# Altium PCB 05-01891R2.1T.PcbDoc
Units mil, origin at the board's own origin, x right, y up, seen from the top; angles counter-clockwise.
Board outline 1628.96 x 2610.93 mil, 2 copper layers (Top Layer, Top, Bottom Layer, Bottom); 39 components, 24 nets, 109 pads, 37 vias.
Unrouted connection lines stored in the file: 3.
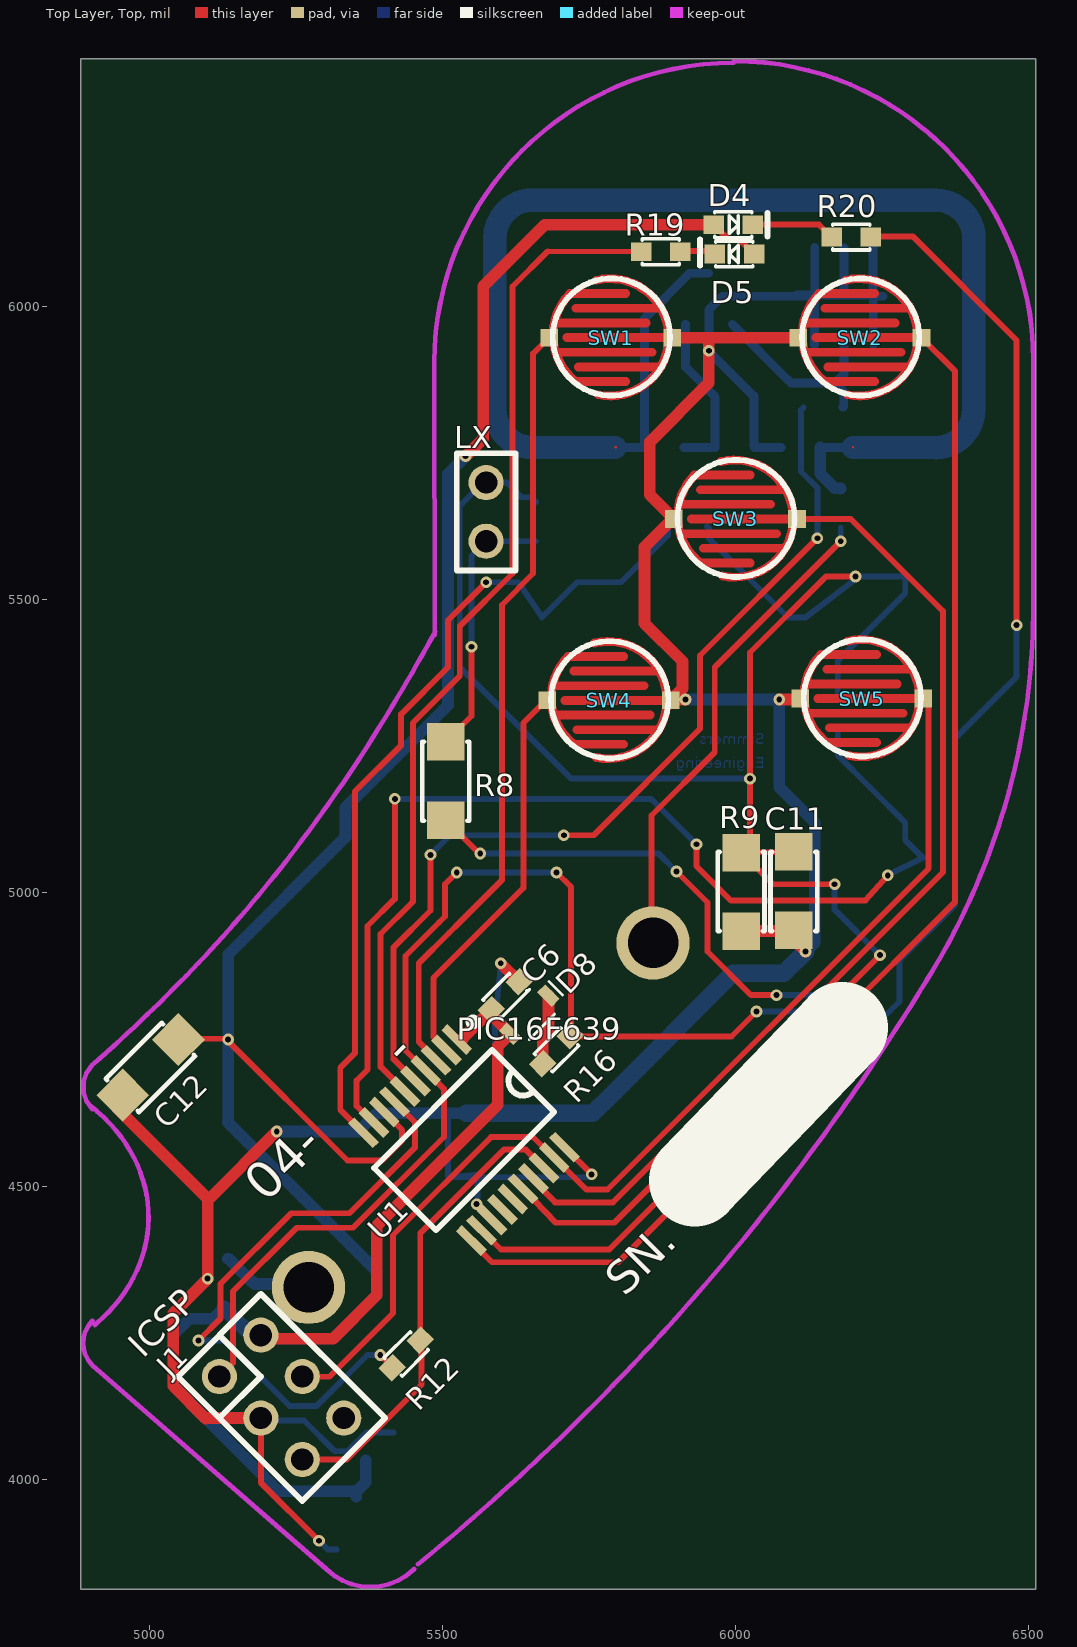
[diagram p0: Top Layer, Top view]
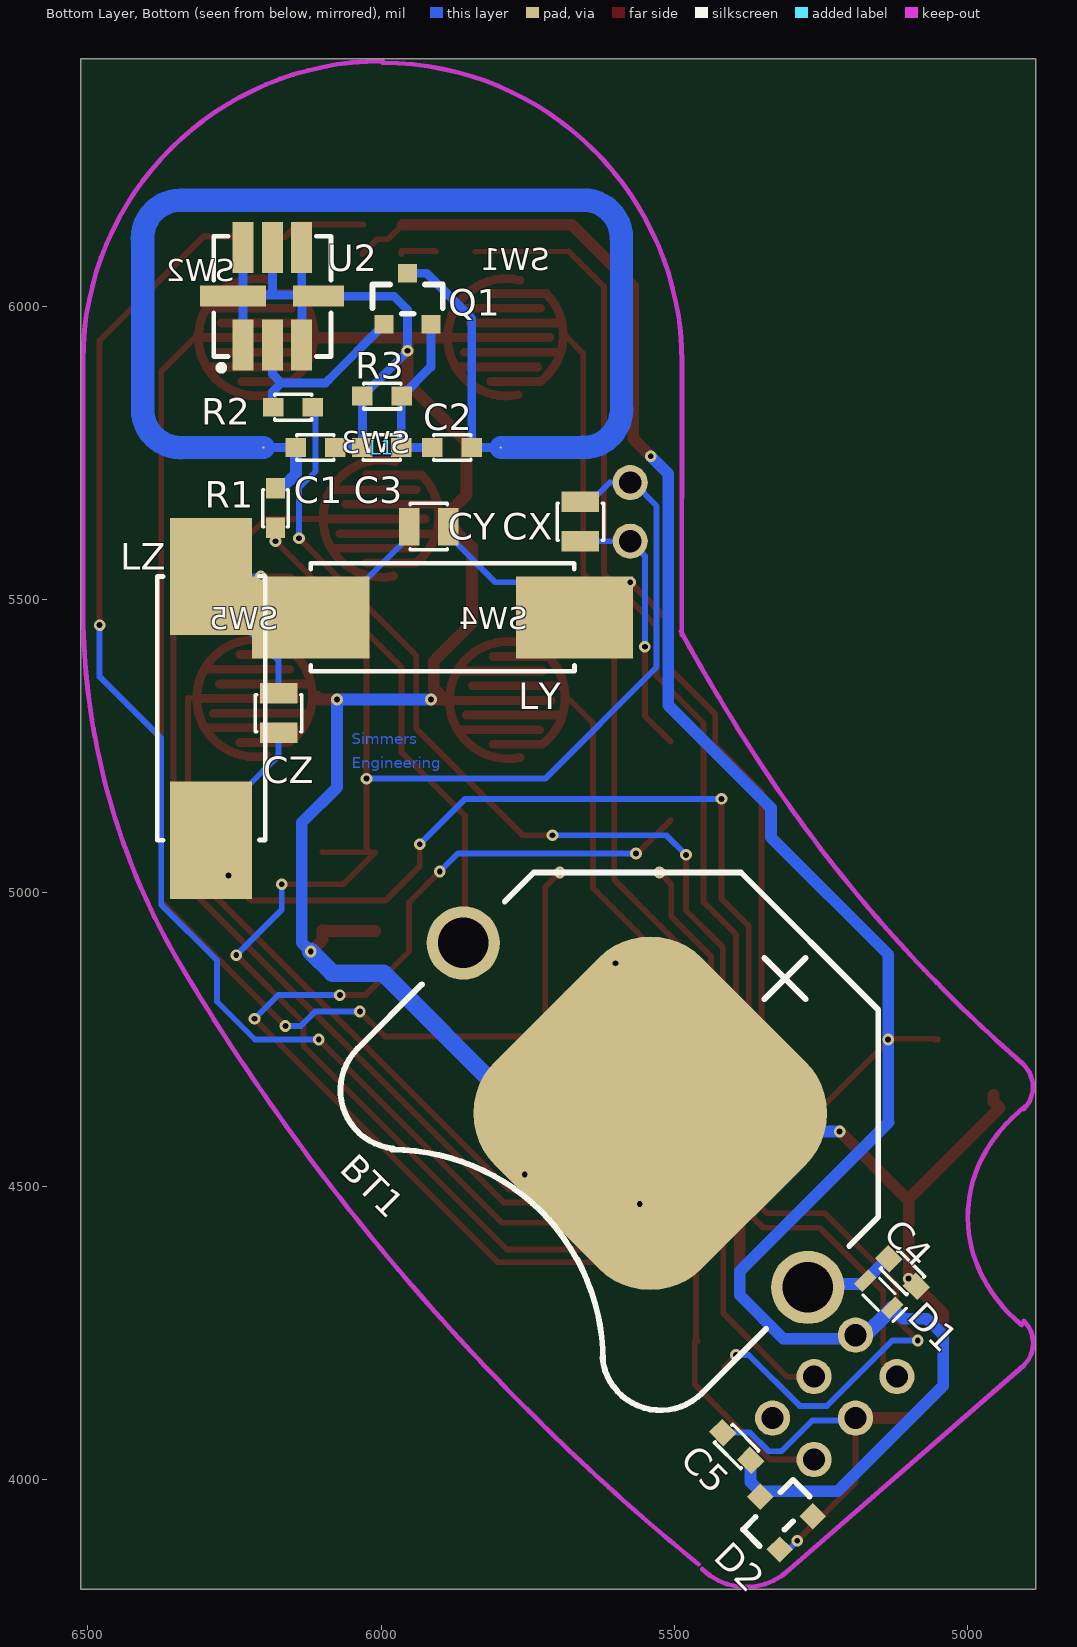
[diagram p1: Bottom Layer, Bottom view, seen from below]

## Layer stack, top to bottom
Top Layer, Top: signal copper 1.4
Dielectric: dielectric 12.6, FR-4, Dk 4.8
Bottom Layer, Bottom: signal copper 1.4

## Board outline
4883.42,3812.17 6512.38,3812.17 6512.38,6423.1 4883.42,6423.1

## Design rules (kind name [scope] priority, off if disabled: settings)
Clearance "Clearance_Top Layer, Top_PadToPad" [ExistsOnLayer('Top Layer, Top') And IsPad vs ExistsOnLayer('Top Layer, Top') And IsPad] p1: gap=5
Clearance "Clearance_Top Layer, Top_PadToLine" [ExistsOnLayer('Top Layer, Top') And IsPad vs ExistsOnLayer('Top Layer, Top') And IsWire] p2: gap=5
Clearance "Clearance_Top Layer, Top_LineToLine" [ExistsOnLayer('Top Layer, Top') And IsWire vs ExistsOnLayer('Top Layer, Top') And IsWire] p3: gap=5
Clearance "Clearance_Top Layer, Top_ViaToPad" [ExistsOnLayer('Top Layer, Top') And IsVia vs ExistsOnLayer('Top Layer, Top') And IsPad] p4: gap=5
Clearance "Clearance_Top Layer, Top_ViaToLine" [ExistsOnLayer('Top Layer, Top') And IsVia vs ExistsOnLayer('Top Layer, Top') And IsWire] p5: gap=5
Clearance "Clearance_Top Layer, Top_ViaToVia" [ExistsOnLayer('Top Layer, Top') And IsVia vs ExistsOnLayer('Top Layer, Top') And IsVia] p6: gap=5
Clearance "Clearance_Bottom Layer, Bottom_PadToPad" [ExistsOnLayer('Bottom Layer, Bottom') And IsPad vs ExistsOnLayer('Bottom Layer, Bottom') And IsPad] p7: gap=5
Clearance "Clearance_Bottom Layer, Bottom_PadToLine" [ExistsOnLayer('Bottom Layer, Bottom') And IsPad vs ExistsOnLayer('Bottom Layer, Bottom') And IsWire] p8: gap=5
Clearance "Clearance_Bottom Layer, Bottom_LineToLine" [ExistsOnLayer('Bottom Layer, Bottom') And IsWire vs ExistsOnLayer('Bottom Layer, Bottom') And IsWire] p9: gap=5
Clearance "Clearance_Bottom Layer, Bottom_ViaToPad" [ExistsOnLayer('Bottom Layer, Bottom') And IsVia vs ExistsOnLayer('Bottom Layer, Bottom') And IsPad] p10: gap=5
Clearance "Clearance_Bottom Layer, Bottom_ViaToLine" [ExistsOnLayer('Bottom Layer, Bottom') And IsVia vs ExistsOnLayer('Bottom Layer, Bottom') And IsWire] p11: gap=5
Clearance "Clearance_Bottom Layer, Bottom_ViaToVia" [ExistsOnLayer('Bottom Layer, Bottom') And IsVia vs ExistsOnLayer('Bottom Layer, Bottom') And IsVia] p12: gap=5
Clearance Clearance_Design_HoleToHole [(IsVia Or IsThruPin) vs (IsVia Or IsThruPin)] p13: gap=5
Clearance Clearance_Design_LineToLine [IsWire vs IsWire] p14: gap=5
Clearance Clearance_Design_PadToLine [IsPad vs IsWire] p15: gap=5
Clearance Clearance_Design_PadToPad [IsPad vs IsPad] p16: gap=5
Clearance Clearance_Design_ViaToLine [IsVia vs IsWire] p17: gap=5
Clearance Clearance_Design_ViaToPad [IsVia vs IsPad] p18: gap=5
Clearance Clearance_Design_ViaToVia [IsVia vs IsVia] p19: gap=5
Clearance [All] p20: gap=5
PlaneClearance [All] p1: clearance=12
PolygonConnect [All] p1: connectstyle=Relief reliefconductorwidth=10 reliefentries=4 polygonreliefangle="90 Angle" airgapwidth=10
RoutingVias [All] p1: holewidth=28 width=50 viastyle="Through Hole" minholewidth=28 minwidth=50 maxholewidth=28 maxwidth=50
SilkToSolderMaskClearance SilkscreenOverComponentPads [IsPad] p1: minsilkscreentomaskgap=10 clearancetoexposedcopper=TRUE
SolderMaskExpansion [All] p1: expansion=4
Width [All] p1: maxlimit=10 minlimit=10 preferedwidth=10
26 further rules are at their usual default settings.

## Components (designator, comment, footprint, x,y, rotation, side; value= is the part's Value field where it differs from the comment)
BT1 "" BAT20MMKEY3003 5555,4610 r135 bottom
C1 "470pF" CAP0603 6145.39,5759.88 r180 bottom
C2 "0.5pF" CAP0603 5845.39,5759.88 r0 bottom
C3 "18pF" CAP0603 5965.39,5759.88 r0 bottom
C4 "100nF" CAP0603 5134.1,4376.2 r225 bottom
C5 "1uF" CAP0603 5369.7,4032.1 r45 bottom
C6 "100nF" CAP0603 5583.8,4801.1 r45 top
C11 "1uF" CC1206 6100,5070 r270 top
C12 "1uF" CC1206 5050,4750 r225 top
CX "180pF" CAP-0603-DOUBLE 5660,5600 r90 bottom
CY "220pF" CAP-0603-DOUBLE 5885,5625 r0 bottom
CZ "220pF" CAP-0603-DOUBLE 6174.7,5340.3 r270 bottom
D1 "MA2S784" DIO-SS-MINI 5127.9,4292.5 r45 bottom
D2 "5.1V" SOT23_DIO-ZENER-BZX84-SOT23(Primary) 5320.1,3880.2 r135 bottom
D4 "{Value}" LED-0603 6030,6140 r270 top
D5 "{Value}" LED-0603 5965,6090 r90 top
D8 "1N4148WS" DIO-SOD-323 5681.25,4825 r225 top
J1 "" HDR-3X2-IDC 5120,4175 r45 top
L1 "433.92MHz" IND-PCB-40M-ROUNDED 5795.88,5759.83 r180 bottom
LX "9.0mH" 2PHDR 5575,5700 r0 top
LY "7.1mH" IND-PROTO 5670,5470 r0 bottom
LZ "7.1mH" IND-PROTO 6290,5090 r90 bottom
Q1 "NE94433" SOT23 5994.77,5969.96 r180 bottom
R1 "47" RES0603 6180,5690 r270 bottom
R2 "47K" RES0603 6116.65,5828.58 r0 bottom
R3 "220" RES0603 6031.77,5847.54 r180 bottom
R8 "Rlimit" RES-CRCW1206 5506,5258 r270 top
R9 "10M" RES-CRCW1206 6010,4935 r90 top
R12 "0" RES0603 5415,4190 r45 top
R16 "100K" RES0603 5718.75,4756.25 r225 top
R19 "600" RES0603 5906.25,6093.75 r180 top
R20 "600" RES0603 6231.25,6118.75 r180 top
SW1 "MOM-NO" SW-PCB-S 5787.74,5947.31 r0 bottom
SW2 "MOM-NO" SW-PCB-S 6212.74,5947.31 r0 bottom
SW3 "MOM-NO" SW-PCB-S 6000.25,5637.91 r0 bottom
SW4 "MOM-NO" SW-PCB-S 5784.61,5328.52 r0 bottom
SW5 "MOM-NO" SW-PCB-S 6215.89,5331.64 r0 bottom
U1 "PIC16F639" SSOP20-MODIFIED 5525,4750 r315 top
U2 "433.92MHz" SAW-ECS-SDR1-SMT 6235.41,5944.96 r180 bottom

## Footprints (in the part's own frame and the unit in brackets; to place one, negate y for a bottom-side part, rotate by r counter-clockwise, add the part's x,y. Pads: shape width x height; smd on the part's side, far side on the other; paste and mask are expansions set on the pad)
2PHDR [mil]
  round 60 hole 38: 1(0,0) 2(0,-100)
  silkscreen extent -50,-150 50,50
BAT20MMKEY3003 [mil]
  rrect50% 500x500 smd: 1(20,0)
  round 125 hole 86: 2(0,431) 3(0,-400)
  silkscreen extent -355,-400 420,431
CAP0603 [mil]
  rect 35x32 smd: 1(0,0) 2(67,0)
  silkscreen extent 2,-22 65,22
CAP-0603-DOUBLE [mil]
  rect 35x64 smd: 1(0,0) 2(67,0)
  silkscreen extent 2,-40 65,40
CC1206 [mil]
  rect 64x64 smd: 1(0,0) 2(134,0)
  silkscreen extent 0,-40 135,40
DIO-SOD-323 [mil]
  rect 20x35 smd: 1(92.5,0) 2(0,0)
  silkscreen extent -18,-30 76,30
DIO-SS-MINI [mil]
  rect 20x35 smd: 1(65,0) 2(0,0)
  silkscreen extent -18,-20 51,20
HDR-3X2-IDC [mil]
  round 60 hole 38: 1(0,0) 2(100,0) 3(0,-100) 4(100,-100) 5(0,-200) 6(100,-200)
  silkscreen extent -50,-250 150,50
IND-PCB-40M-ROUNDED [mm]
  round 0.1 smd: 1(0,0) 2(-10.287,0)
  Top Layer, Top lines w1.016: 5.235,1.653 cw(c3.584,1.653) 3.584,0.002 ; 5.232,1.676 5.232,9.093 ; 5.23,9.071 ccw(c3.579,9.071) 3.579,10.722 ; 3.556,0 0.025,0 ; 3.556,10.719 -13.868,10.719 ; -10.287,0 -13.843,0 ; -13.866,-0.003 cw(c-13.866,1.648) -15.517,1.648 ; -13.871,10.716 ccw(c-13.871,9.065) -15.522,9.065 ; -15.519,1.651 -15.519,9.068
IND-PROTO [mil]
  rect 200x140 smd: 1(0,0) 2(450,0)
  silkscreen extent 0,-92 450,92
LED-0603 [mil]
  rect 32x35 smd: 1(0,0) 2(0,-67)
  silkscreen extent -22,-65 22,-2
RES0603 [mil]
  rect 35x32 smd: 1(0,0) 2(67,0)
  silkscreen extent 2,-22 65,22
RES-CRCW1206 [mil]
  rect 64x64 smd: 1(0,0) 2(134,0)
  silkscreen extent 0,-40 135,40
SAW-ECS-SDR1-SMT [mil]
  rect 36x87 smd: 1(0,-10) 2(50,-10) 3(100,-10) 5(100,156) 6(50,155.67) 7(0,155.67)
  rect 87x36 smd: 4(129,73)
  rect 113x36 smd: 8(-17,73)
  silkscreen extent -50,-54 150,175
SOT23 [mil]
  rect 32x32 smd: 1(0,0) 2(80,0) 3(40,87)
  silkscreen extent -20,18 100,68
SOT23_DIO-ZENER-BZX84-SOT23(Primary) [mil]
  rect 32x32 smd: 1(40,87) 2(0,0) 2(80,0)
  silkscreen extent -20,18 100,68
SSOP20-MODIFIED [mil]
  rect 60x15 smd: 1(0,0) 2(0,-25) 3(0,-50) 4(0,-75) 5(0,-100) 6(0,-125) 7(0,-150) 8(0,-175) 9(0,-200) 10(0,-225) 11(260,-225) 12(260,-200) 13(260,-175) 14(260,-150) 15(260,-125) 16(260,-100) 17(260,-75) 18(260,-50) 19(260,-25) 20(260,0)
  silkscreen extent 55,-255 205,30
SW-PCB-S [mil]
  rect 30x30 smd far side: 1(-105,0) 2(105,0)
  Bottom Layer, Bottom lines w15: -95,-25 60,-25 ; -90,25 70,25 ; -75,0 95,0 ; -70,-75 25,-75 ; -69.75,-74.79 cw(c1.33,-4.45) -59.82,74.67 ; -60,-50 85,-50 ; -55,75 25,75 ; -55,50 85,50 ; -24.51,-97.83 ccw(c-1.33,-0.55) -21.44,97.41

## Part data
D1 D8: "Leadless Schottky Rectifier, 1 Ampere"

## Via types
v1: diameter 20, hole 10, Top Layer, Top to Bottom Layer, Bottom, 37 vias

## Nets (pads, with @x,y where several pads share a name; then routed paths per layer and width w, separated by ;. In a path a pad name is that pad's centre, name@x,y a point inside that pad or via, vN(x,y) a via of type N, cw(c..) or ccw(c..) an arc to the next point about the centre after c; other vN are vias at no path point)
DATA_OUT: R2.1 U1.5 | length 1621
  Top Layer, Top w10: U1.5 5417.25,4716.33 5417.25,4907.25 5480,4970 5480,4985.97 v1(5480,5065) ; v1(5707.6,5098.5) 5758.5,5098.5 5940,5280 5940,5405 v1(6140,5605)
  Bottom Layer, Bottom w10: v1(5480,5065) 5513.5,5098.5 v1(5707.6,5098.5) ; R2.1 6112,5823.93 6112,5719 6140,5691 v1(6140,5605)
GND: C1.2 C3.2 C4.2 C5.2 C6.2 C11.2 C12.2 D2.2@5263.53,3936.77 J1.3 R3.1 R9.1 U1.13 U1.20 U2.1 U2.3 U2.4 U2.5 U2.6 U2.7 U2.8 | length 6549.2
  Top Layer, Top w10: J1.3 5190.71,3994.11 v1(5290,3895) ; v1(5558.8,4469.2) 5558.8,4468.71 U1.13 ; U1.20 v1(5755,4520) ; C11.2@6100,4935 C11.2 ; U1.13 5588,4439.5 U1.13
  Top Layer, Top w20: C12.2 4955.25,4643.75 4945,4633.5 5100,4478.5 ; 5095,4105 5095.84,4104.29 ; 5095.71,4104.29 5095.84,4104.29 ; J1.3 5095.84,4104.29 ; v1(5217.8,4593.2) 5103.1,4478.5 5100,4478.5 ; v1(5600,4880) 5600,4879.65 C6.2 ; 5892.74,5947.31 5915,5947.31 5955,5947.31 ; v1(5915,5330) 5891.1,5330 ; R9.1 C11.2@6100,4935 ; v1(6075,5330) 6105,5330 6110,5335 6110.89,5331.64 ; C11.2 C11.2@6100,4935 ; 6107.74,5947.31 5955,5947.31 ; v1(6119.9,4900.1) 6101.3,4918.7 6100,4920 C11.2@6100,4935 ; 5095.84,4104.29 5096.9,4103.4 5041.1,4159.2 5041.1,4283.2 v1(5100,4342.1) 5100,4478.5 ; 5891.1,5330 5890,5330 5889.61,5328.52 5891.1,5330 ; 5891.1,5330 5910,5348.9 5910,5395 5845,5460 5845,5590 5894.08,5639.08 ; 5894.08,5639.08 5895.25,5637.91 5895,5640 5894.08,5639.08 ; 5894.08,5639.08 5854.1,5679.06 5854.1,5769.1 5955,5870 v1(5955,5925) 5955,5947.31
  Bottom Layer, Bottom w10: J1.3 5195,4100 5195.3,4100.3 5264.3,4100.3 5317,4047.6 5338.7,4047.6 5370.58,4079.48 C5.2 ; v1(5290,3895) 5304.8,3880.2 5320.1,3880.2 ; v1(5558.8,4469.2) 5560,4470.4 5560,4515 ; v1(5600,4880) 5589.8,4773 5590,4772.8 5590,4630 5540.86,4624.14 5510,4625 5510,4624.14 5510,4517.51 5512.51,4515 ; v1(5755,4520) 5750,4515 5560,4515 ; 5512.51,4515 5560,4520 5560,4515 ; 5512.51,4515 5560,4515
  Bottom Layer, Bottom w15: C1.2 6075.12,5759.88 6075,5760 6074.88,5759.88 C3.2 6035,5760 6031.77,5763.23 R3.1 5955,5924.31 v1(5955,5925) 5955,5995 5977.96,6017.96 U2.4 U2.4@6121.31,6017.96 ; U2.3 U2.3@6135,5935 ; U2.5 U2.4@6135.41,6020 ; U2.6 6185.41,6020 ; U2.1 6235.41,6014.59 U2.8@6235,6015 ; U2.4@6121.31,6017.96 U2.4@6133.57,6016.43 ; U2.4@6121.31,6017.96 6132.04,6017.96 U2.4@6133.57,6016.43 ; U2.4@6121.31,6017.96 6105,6020 U2.4@6135.41,6020 ; U2.4@6133.57,6016.43 6135,6015 U2.3@6135,5935 ; U2.4@6133.57,6016.43 U2.4@6135.41,6016.2 ; U2.3@6135,5935 6135.41,5935.41 U2.4@6135.41,6016.2 ; U2.4@6135.41,6016.2 U2.4@6135.41,6020 ; U2.4@6135.41,6020 6185.41,6020 ; 6185.41,6020 6235,6020 U2.8@6235,6015 ; U2.8@6235,6015 U2.8@6235.41,6015.41 ; U2.8@6235.41,6015.41 U2.8@6235.41,6024.59 ; U2.8@6235.41,6015.41 U2.8@6237.96,6017.96 ; U2.8@6235.41,6015.41 U2.8@6237.96,6017.96 ; U2.8@6235.41,6024.59 U2.7 6235,6100 6235,6025 U2.8@6235.41,6024.59 ; U2.8@6235.41,6024.59 U2.8@6242.04,6017.96 ; U2.8@6237.96,6017.96 U2.8@6242.04,6017.96 ; U2.8@6237.96,6017.96 U2.8@6242.04,6017.96 ; U2.8@6237.96,6017.96 U2.8@6242.04,6017.96 ; U2.8@6242.04,6017.96 U2.8 ; U2.8@6242.04,6017.96 U2.8 ; U2.8@6242.04,6017.96 U2.8
  Bottom Layer, Bottom w20: C4.2 v1(5100,4342.1) ; v1(5217.8,4593.2) 5357.3,4593.2 5388.24,4624.14 5510,4624.14 5540.86,4624.14 ; v1(5915,5330) 5955,5330 v1(6075,5330) 6075,5180.6 6135.4,5120.2 6135.4,4915.4 6120.1,4900.1 v1(6119.9,4900.1)
  Bottom Layer, Bottom w30: 5540.86,4624.14 5757.14,4624.14 5788.2,4655.2 5995.9,4862.9 6082.7,4862.9 ; 6082.9,4862.9 6082.7,4862.9 ; v1(6119.9,4900.1) 6082.7,4862.9
LCCOM-PIN: C11.1 CX.2 CY.2 CZ.1 LX.1 LY.2 LZ.2 R9.2 U1.12 | length 3640.6
  Top Layer, Top w10: U1.12 5600.46,4391.7 5785.1,4391.7 6132.3,4738.9 6132.3,4779.2 v1(6247,4893.9) ; C11.1 R9.2@6018.5,5069.09 ; v1(6169.5,5014.8) 6064.2,5014.8 R9.2 ; v1(6205,5540) 6155,5540 6025,5410 v1(6025,5195) 6025,5075 R9.2@6018.5,5069.09 ; R9.2 6018.4,5069 R9.2@6018.5,5069.09 ; R9.2 R9.2@6018.5,5069.09
  Bottom Layer, Bottom w10: CX.2 5652,5675 5635,5675 5610,5700 LX.1 ; CY.2 5955,5622 5955,5605 6090,5470 LY.2 6205,5535 v1(6205,5540) LZ.2 6290,5511.4 6224.3,5445.7 6174.7,5396.1 CZ.1 ; v1(6025,5195) 6020,5195 5850.99,5195 ; v1(6169.5,5014.8) 6169.5,4971.4 v1(6247,4893.9) ; LX.1@5570,5701.11 5570,5700 LX.1 ; LX.1@5570,5701.11 LX.1 ; LX.1@5570,5701.11 5530,5660 5530,5385 5720,5195 5849.09,5195.38 ; 5849.09,5195.38 ccw(c5850.99,5200) 5850.99,5195 ; 5849.09,5195.38 5850.99,5195
LF_DATA: R12.1 U1.7 | length 1055
  Top Layer, Top w10: v1(5084.5,4236.7) 5121.7,4273.9 5121.7,4332.8 5242.6,4453.7 5341.8,4453.7 5453.4,4565.3 5453.4,4609.47 U1.7 ; v1(5394.5,4211.9) 5415,4191.4 R12.1
  Bottom Layer, Bottom w10: v1(5084.5,4236.7) 5127.9,4236.7 5239.5,4125.1 5286,4125.1 5372.8,4211.9 v1(5394.5,4211.9)
LX-PIN: R8.2 U1.11 | length 1754.1
  Top Layer, Top w10: R8.2 5506.1,5124.1 5562.7,5067.5 v1(5565,5067.5) ; U1.11 5549.75,4405.25 5550,4405 5585,4370 5800.6,4370 v1(6216,4785.4) ; v1(5899.8,5036.5) 5952.5,4983.8 5952.5,4900.1 6026.9,4825.7 v1(6070.3,4825.7)
  Bottom Layer, Bottom w10: v1(5565,5067.5) 5868.8,5067.5 v1(5899.8,5036.5) ; v1(6070.3,4825.7) 6175.7,4825.7 v1(6216,4785.4)
LY-PIN: CY.1 LY.1 U1.10 | length 1473.7
  Top Layer, Top w10: U1.10 5365.8,4590.9 5326.3,4630.4 5326.3,4701.7 5351.1,4726.5 5351.1,5172.9 5430,5251.8 5430,5305 5510,5385 5510,5465 v1(5575,5530)
  Bottom Layer, Bottom w10: v1(5575,5530) 5630,5530 LY.1 5730,5530 5805,5530 5885,5610 CY.1
LZ-PIN: CZ.2 LZ.1 U1.9 | length 1886.2
  Top Layer, Top w10: U1.9 5382.22,4608.58 5375.9,4614.9 5354.2,4636.6 5354.2,4680 5372.8,4698.6 5372.8,4943.5 5419.3,4990 v1(5419.3,5160.5) ; v1(5933.9,5083) 5933.9,5045.8 5992.8,4986.9 6221.9,4986.9 v1(6260,5030)
  Bottom Layer, Bottom w10: v1(5419.3,5160.5) 5856.4,5160.5 v1(5933.9,5083) ; CZ.2 6174.7,5234.9 6230.5,5179.1 6290,5119.6 LZ.1 6320,5060 v1(6260,5030)
MCLR: J1.1 R16.1 U1.4 | length 3403
  Top Layer, Top w10: J1.1 5143.4,4198.4 5143.4,4320.4 5251.9,4428.9 5348,4428.9 5503,4583.9 5503,4665.93 ; U1.4 5471.97,4696.91 U1.4@5481.27,4687.6 ; v1(5525,5035) 5505,5015 5505,4977.84 5505,4960 5494.67,4949.67 5437.5,4892.5 5437.5,4793.75 5437.5,4731.25 U1.4@5481.27,4687.6 ; v1(5695,5035) 5720,5010 R16.1@5720,4756.13 ; v1(6036.2,4797.8) 5993.4,4755 5721.13,4755 R16.1@5720,4756.13 ; v1(6163.3,4773) 6375,4985 6375,5875 6375,5890 6317.74,5947.26 ; U1.4@5481.27,4687.6 5500,4668.75 5503,4665.93 ; U1.4@5481.27,4687.6 5503,4665.93 ; R16.1@5720,4756.13 R16.1 5720,4755 R16.1@5720,4756.13
  Bottom Layer, Bottom w10: v1(5525,5035) v1(5695,5035) ; v1(6036.2,4797.8) 6112.2,4797.8 6137,4773 v1(6163.3,4773)
NET00000: D8.2 R16.2 | length 120.2
  Top Layer, Top w20: R16.2 5671.37,4756.37 5681.25,4766.25 D8.2
NET00001: C1.1 C2.1 L1.1 L1.2 Q1.3 R1.1 | length 557.8
  Bottom Layer, Bottom w15: L1.1 C2.1 5845.39,5980.39 5921.96,6056.96 Q1.3 ; C1.1 6145,5760 6145.17,5759.83 L1.2
  Bottom Layer, Bottom w20: C1.1@6145,5760 6145,5715 6169.8,5690.2 R1.1
NET00002: C2.2 C3.1 Q1.2 R3.2 | length 284.1
  Bottom Layer, Bottom w15: C2.2 C3.1 5965.39,5844.61 5965,5845 R3.2 5915,5897.31 5915,5970 Q1.2
NET00003: D5.1 R19.1 | length 64.3
  Top Layer, Top w10: R19.1 5907.5,6095 5965,6095 D5.1
NET00005: Q1.1 R2.2 U2.2 | length 336.2
  Bottom Layer, Bottom w15: Q1.1 6089.73,5875 6090,5875 6095,5870 6170,5870 ; R2.2 6185,5829.93 6185,5855 6170,5870 ; U2.2 6185.41,5885.41 6170,5870
NET00006: D4.1 R20.2 | length 143.1
  Top Layer, Top w10: D4.1 6143,6140 R20.2
NET00016: CX.1 LX.2 R8.1 | length 455.6
  Top Layer, Top w10: R8.1 5550,5302 v1(5550,5420)
  Bottom Layer, Bottom w10: v1(5550,5420) 5550,5575 LX.2 CX.1
RA0/DATA: J1.4 U1.19 | length 1908.2
  Top Layer, Top w10: J1.4 5255.3,4175 5255,4174.7 5307.7,4174.7 5416.2,4283.2 5416.2,4416.5 5583.6,4583.9 5654.9,4583.9 U1.19@5690.33,4548.47 ; 6320.89,5331.64 6329.5,5333.03 6329.5,5041.5 5782,4494 5746,4494 U1.19@5691.17,4548.83 ; U1.19@5690,4550 U1.19@5690.33,4548.47 ; U1.19@5690,4550 U1.19@5690.33,4548.47 ; U1.19@5690,4550 U1.19@5690.33,4548.47 ; U1.19@5690,4550 U1.19@5691.17,4548.83 ; U1.19@5690,4550 U1.19@5691.17,4548.83 ; U1.19@5690,4550 U1.19@5691.17,4548.83 ; U1.19@5690,4550 U1.19@5691.17,4548.83 ; U1.19@5690.33,4548.47 U1.19@5691.17,4548.83 ; U1.19@5690.33,4548.47 U1.19 ; U1.19@5690.33,4548.47 U1.19 ; U1.19@5690.33,4548.47 U1.19 ; U1.19@5690.33,4548.47 U1.19@5691.17,4548.83 ; U1.19 U1.19@5691.17,4548.83
RA1/CLK: J1.5 R12.2 U1.18 | length 808.7
  Top Layer, Top w8: R12.2 R12.2@5465,4234.75
  Top Layer, Top w10: J1.5 5337.08,4033.58 5465,4161.5 R12.2@5465,4234.75 ; R12.2 5460,4235 R12.2 ; R12.2 5462.7,4237.7 5462.7,4419.6 5605.3,4562.2 5642.5,4562.2 U1.18@5673.9,4530.8 ; U1.18@5673.9,4530.8 U1.18 5673.95,4530.34 U1.18@5674.36,4530.34 ; U1.18@5673.9,4530.8 U1.18@5674.36,4530.34 ; U1.18@5673.9,4530.8 U1.18@5674.36,4530.34
RA2: U1.17 | length 1711.1
  Top Layer, Top w10: U1.17 5655.81,4510.81 5655,4510 5692.7,4472.3 5791.3,4472.3 6354.26,5035.26 6354.26,5480.74 6197.09,5637.91 6105.25,5637.91
RC0: R20.1 U1.16 | length 2356.1
  Top Layer, Top w10: U1.16 5693.75,4437.5 5793.75,4437.5 v1(6106.25,4750) ; R20.1 6233.75,6118.75 6235,6120 6302.5,6120 6480,5942.5 v1(6480,5456.8)
  Bottom Layer, Bottom w10: v1(6106.25,4750) 6215,4750 6280,4815 6280,4885 6375,4980 6375,5263.8 6480,5368.8 v1(6480,5456.8)
RC4: R19.2 U1.6 | length 2046.1
  Top Layer, Top w10: 5530,5430 5530,5455 ; R19.2 5837.5,6093.75 5680.31,6094.65 5620,6034.65 5620,5545 5530,5455 ; 5394.5,4704.8 5394.5,4928 ; 5394.5,4704.8 5395,4703.22 ; 5394.5,4704.8 5395,4704.3 ; 5394.5,4928 5395,4930 ; 5394.5,4928 5395,4928.5 ; 5395,4703.22 U1.6 5436.61,4662.69 5434.8,4664.5 5395,4704.3 ; 5395,4703.22 5395,4704.3 ; 5395,4703.22 5395,4704.3 ; 5395,4703.22 5395,4704.3 ; 5395,4703.22 5395,4704.3 ; 5395,4703.22 5395,4704.3 ; 5395,4703.22 5395,4704.3 ; 5395,4704.3 5395,4928.5 ; 5395,4928.5 5395,4930 ; 5395,4930 5448,4983 5450,4985 5450,5290 5530,5370 5530,5455
S1: U1.3 | length 1337.6
  Top Layer, Top w10: U1.3 5489.64,4715.06 5487.5,4717.2 5468.75,4737.5 5460,4746.25 5460,4880 5511.81,4931.81 5530,4950 5602.3,5022.3 5602.3,5412.3 5602,5412 5602,5491 5655,5545 5655,5920 5680,5945 5682.31,5947.31 5682.74,5947.31
SO: U1.2 | length 690.3
  Top Layer, Top w10: 5679.61,5328.52 5677.02,5328.52 5673.5,5325 5638.5,5290 5638.5,5008.5 5485,4855 5485,4754.78 U1.2@5507.45,4732.32 ; U1.2@5507.45,4732.32 U1.2 5508.18,4731.47 5508.31,4731.47 U1.2@5507.45,4732.32
VBAT: C4.1 D1.1 R1.2 | length 1010.3
  Top Layer, Top w10: 5859.76,4914.76 5859.76,4915.24 5857,4918 5857,5132 5965,5240 5965,5385 v1(6180,5600)
  Bottom Layer, Bottom w10: v1(6180,5600) R1.2
  Bottom Layer, Bottom w20: C4.1 5136.12,4376.2 5137.2,4375.12 D1.1 ; 5272.16,4327.16 5254.44,4327.16 5248.8,4332.8 D1.1@5180.6,4332.8 ; D1.1 D1.1@5180.6,4332.8 ; D1.1 5174.94,4338.46 D1.1@5180.6,4332.8
VDD: C5.1 C6.1 C12.1 D1.2 D2.1 D4.2 D5.2 D8.1 J1.2 U1.1 U1.8 | length 4971
  Top Layer, Top w10: C12.1 5055.3,4750 5056.6,4751.3 v1@5131,4751.3 ; v1(5135,4750) 5132.3,4750 v1@5131,4751.3 ; U1.8 5431.7,4595.81 5431.7,4577.7 5397.6,4543.6 5338.7,4543.6 v1@5131,4751.3 ; U1.1 U1.1@5535,4750 ; D4.2 5988,6115 6007,6115 D5.2
  Top Layer, Top w20: J1.2 5196.62,4239.8 5313.9,4239.8 5388.3,4314.2 5388.3,4345.2 5388.3,4432 5594.91,4638.61 5594.91,4730.53 5595,4730 5595,4738.75 D8.1 5580,4795.44 C6.1@5580,4797.3 ; U1.1@5535,4750 5535,4752.3 C6.1@5580,4797.3 ; v1(5540,5745) 5570,5775 5570,6035 5675,6140 D4.2 ; C6.1@5580,4797.3 5580,4800 C6.1 C6.1@5580,4797.3
  Bottom Layer, Bottom w20: D1.2@5130,4290 D1.2 5109.3,4273.9 5069,4273.9 5041.1,4246 5041.1,4159.2 5220.9,3979.4 D2.1@5354.2,3979.4 ; D2.1 5353.33,3978.53 D2.1@5354.2,3979.4 ; C5.1 5369.7,3994.9 D2.1@5354.2,3979.4 ; v1(5540,5745) 5510,5715 5510,5320 5335,5145 5335,5095 5135,4895 v1(5135,4750) 5135,4610 5134.1,4608.7 5388.3,4354.5 5388.3,4314.2 5313.9,4239.8 J1.2@5193,4239.8 ; J1.2@5193,4239.8 J1.2 5190.71,4242.09 J1.2@5193,4239.8
  Bottom Layer, Bottom w25: D1.2 5127.9,4292.1 5130,4290 5180,4240 J1.2
pads on no net: BT1.1 BT1.2 BT1.3 D2.2@5320.1,3880.2 J1.6 SW1.1 SW1.2 SW2.1 SW2.2 SW3.1 SW3.2 SW4.1 SW4.2 SW5.1 SW5.2 U1.14 U1.15
copper on no net: | length 1.7
  Top Layer, Top w3.94: 5795.88,5759.83 5795.88,5760.57 5796.14,5760.83 ; 6200.88,5759.83 6200.88,5760.38

## Keep-outs
Keep-Out Layer, Board:
  lines w8: 4898.86,4637.98 4911.07,4627.94 4922.49,4617.51 4933.12,4606.72 4942.96,4595.59 4952.01,4584.16 4960.27,4572.43 4967.73,4560.45 4974.4,4548.24 4980.28,4535.82 4985.36,4523.22 4989.64,4510.47 4993.14,4497.58 4995.83,4484.6 4997.72,4471.54 4998.82,4458.43 4999.12,4445.29 4998.62,4432.16 4997.31,4419.05 4995.21,4406 4992.31,4393.03 4988.6,4380.17 4984.09,4367.44 4978.77,4354.86 4972.65,4342.47 4965.73,4330.29 4957.99,4318.35 4949.46,4306.67 4940.11,4295.28 4929.96,4284.2 4918.99,4273.47 4907.22,4263.1 ; 4903.7,4270.14 4896.66,4261.78 4891.38,4252.1 4888.74,4242.42 4887.42,4231.86 4888.74,4221.74 4891.38,4212.06 4896.66,4202.38 4903.7,4194.02 5302.34,3846.86 5315.58,3835.81 5330.03,3827.22 5345.36,3821.08 5361.3,3817.4 5377.52,3816.17 5393.74,3817.4 5409.63,3821.08 5424.91,3827.22 5439.26,3835.81 5452.38,3846.86 ; 4903.7,4630.94 4893.35,4644.94 4888.18,4660.78 4888.18,4677.22 4893.35,4693.06 4903.7,4707.06 4915.78,4717.69 4927.75,4728.35 4939.61,4739.03 4951.36,4749.73 4963,4760.46 4974.54,4771.22 4985.97,4782 4997.29,4792.82 5008.51,4803.66 5019.64,4814.54 5030.66,4825.45 5041.58,4836.4 5052.41,4847.39 5063.15,4858.41 5073.79,4869.47 5084.34,4880.58 5094.8,4891.73 5105.17,4902.92 5115.45,4914.16 5125.65,4925.44 5135.76,4936.77 5145.79,4948.16 5155.74,4959.59 5165.61,4971.08 5175.4,4982.62 5185.12,4994.21 5194.76,5005.87 5204.32,5017.58 5213.82,5029.35 5223.24,5041.19 5232.59,5053.08 5241.88,5065.04 5251.1,5077.07 5260.25,5089.16 5269.35,5101.32 5278.38,5113.55 5287.35,5125.86 5296.26,5138.23 5305.11,5150.68 5313.91,5163.21 5322.65,5175.81 5331.34,5188.49 5339.98,5201.25 5348.57,5214.1 5357.12,5227.02 5365.61,5240.03 5374.06,5253.13 5382.47,5266.31 5390.83,5279.58 5399.16,5292.94 5407.44,5306.4 5415.69,5319.94 5423.9,5333.58 5432.08,5347.31 5440.22,5361.15 5448.33,5375.08 5456.41,5389.11 5464.46,5403.24 5472.49,5417.48 5480.48,5431.81 5488.46,5446.26 ; 5458.54,3854.78 5470.6,3864.66 5482.62,3874.58 5494.6,3884.56 5506.53,3894.57 5518.43,3904.64 5530.29,3914.75 5542.1,3924.91 5553.87,3935.12 5565.61,3945.37 5577.29,3955.67 ; 5487.14,5440.1 5486.7,5905.18 5487.58,5931.58 5489.34,5957.54 5492.42,5983.06 5497.26,6008.14 5502.98,6032.78 5509.58,6056.98 5517.5,6080.74 5526.74,6104.06 5537.3,6126.5 5548.3,6148.5 5560.62,6170.06 5573.82,6190.74 5588.34,6210.98 5603.3,6229.9 5619.58,6248.82 5636.3,6266.42 5653.9,6283.14 5672.82,6299.42 5691.74,6314.38 5711.98,6328.9 5732.66,6342.1 5754.22,6354.42 5776.22,6365.42 5798.66,6375.98 5821.98,6385.22 5845.74,6393.14 5869.94,6399.74 5894.58,6405.46 5919.66,6410.3 5945.18,6413.38 5971.14,6415.14 5997.54,6416.02 ; 5997.54,6419.1 6023.94,6418.22 6049.9,6416.46 6075.42,6413.38 6100.5,6408.54 6125.14,6402.82 6149.34,6396.22 6173.1,6388.3 6196.42,6379.06 6218.86,6368.5 6240.86,6357.5 6262.42,6345.18 6283.1,6331.98 6303.34,6317.46 6322.26,6302.5 6341.18,6286.22 6358.78,6269.5 6375.5,6251.9 6391.78,6232.98 6406.74,6214.06 6421.26,6193.82 6434.46,6173.14 6446.78,6151.58 6457.78,6129.58 6468.34,6107.14 6477.58,6083.82 6485.5,6060.06 6492.1,6035.86 6497.82,6011.22 6502.66,5986.14 6505.74,5960.62 6507.5,5934.66 6508.38,5908.26 6508.38,5488.06 6508.27,5471.78 6507.95,5455.56 6507.42,5439.39 6506.67,5423.27 6505.71,5407.21 6504.55,5391.21 6503.17,5375.26 6501.59,5359.37 6499.81,5343.55 6497.82,5327.78 6495.63,5312.08 6493.24,5296.44 6490.65,5280.87 6487.86,5265.37 6484.87,5249.94 6481.69,5234.58 6478.31,5219.29 6474.74,5204.07 6470.98,5188.93 6467.03,5173.86 6462.89,5158.87 6458.56,5143.96 6454.05,5129.13 6449.35,5114.38 6444.47,5099.71 6439.4,5085.13 6434.15,5070.63 6428.72,5056.22 6423.12,5041.89 6417.34,5027.66 6411.38,5013.52 6405.25,4999.47 6398.94,4985.51 6392.47,4971.65 6385.82,4957.88 6379,4944.21 6372.02,4930.64 6364.86,4917.17 6357.55,4903.81 6350.07,4890.54 6342.43,4877.38 6334.62,4864.33 6326.66,4851.38 ; 6333.26,4862.38 6325.14,4849 6316.98,4835.65 6308.76,4822.34 6300.49,4809.06 6292.16,4795.82 6283.79,4782.62 6275.36,4769.45 6266.88,4756.32 6258.35,4743.22 6249.77,4730.16 6241.14,4717.13 6232.46,4704.15 6223.72,4691.2 6214.94,4678.28 6206.1,4665.4 6197.22,4652.56 6188.28,4639.76 6179.3,4627 6170.26,4614.27 6161.18,4601.58 6152.04,4588.93 6142.86,4576.31 6133.62,4563.74 6124.34,4551.2 6115.01,4538.7 6105.63,4526.24 6096.2,4513.82 6086.72,4501.44 6077.19,4489.09 6067.62,4476.79 6057.99,4464.52 6048.32,4452.3 6038.6,4440.11 6028.84,4427.97 6019.02,4415.86 6009.16,4403.79 5999.25,4391.77 5989.29,4379.78 5979.29,4367.84 5969.23,4355.93 5959.14,4344.07 5948.99,4332.25 5938.8,4320.46 5928.56,4308.73 5918.28,4297.03 5907.95,4285.37 5897.57,4273.75 5887.15,4262.18 5876.68,4250.65 5866.17,4239.16 5855.61,4227.71 5845.01,4216.3 5834.36,4204.94 5823.66,4193.62 5812.92,4182.34 5802.14,4171.11 5791.31,4159.92 5780.44,4148.77 5769.52,4137.66 5758.56,4126.6 5747.56,4115.59 5736.51,4104.61 5725.41,4093.68 5714.28,4082.8 5703.1,4071.96 5691.88,4061.16 5680.61,4050.41 ; 5577.29,3955.67 5588.94,3966.01 ; 5577.29,3955.67 5588.94,3966.01 ; 5588.94,3966.01 5600.55,3976.4 5612.11,3986.84 5623.64,3997.32 5635.12,4007.85 5646.55,4018.42 ; 5646.55,4018.42 5657.95,4029.04 ; 5646.55,4018.42 5657.95,4029.04 ; 5657.95,4029.04 5669.3,4039.7 ; 5657.95,4029.04 5669.3,4039.7 ; 5669.3,4039.7 5680.61,4050.41 ; 5669.3,4039.7 5680.61,4050.41

## Other copper
Bottom Layer, Bottom:
  text "Simmers" at 6050,5253.38 h18.75
  text "Engineering" at 6050,5212.5 h18.75

## Silkscreen, mask and mechanical layers (free items; w line width, h text height)
Top Overlay, Top Silk:
  lines w10: 5940,6070 5940,6115 ; 6055,6120 6055,6160 ; 5545,4780 ccw(c5552.5,4780) 5560,4780 ccw(c5552.5,4780) 5545,4780
  lines w156: 5930.54,4509.29 6182.45,4770.03
  text "04-       -" at 5200,4470 h62.5 r45
  text "SN." at 5811.8,4309.83 h56.25 r45
  text "ICSP" at 4990,4205 h43.75 r45
Mechanical 1, Top Assy:
  drawing of 313 lines, arcs and shapes, not listed
  text "NOTES:" at 2540,4315 h100
  text "The Inductor will Sit Loose" at 2540,4105 h100
  text "in the Case of the FOB" at 2540,3895 h100
  text "TOP ASSY" at 5315,3467.5 h100
  text "NOTES:" at 2000,2279.17 h75
  text "1. THIS ASSEMBLY TO BE MANUFACTURED TO MEET ALL ACCEPTANCE" at 2000,2120.83 h75
  text "LEVELS OF A CLASS 2 ASSEMBLY PER ANSI/IPC-A-610B." at 2000,1962.5 h75
  text "2. ALL UNUSED COMPONENTS SHALL BE FREE OF SOLDER" at 2300,1820 h75
  text "3. ALL COMPONENTS SHALL BE MOUNTED FLUSH TO THE BOARD, EXCEPT AS NOTED." at 2300,1620 h75
  text "4. FINISHED BOARD SHELL BE FREE OF ALL RESIDUES." at 2300,1412.5 h75
  text "02-        -D" at 14375,1302.5 h112.5
  text "5. ALL LEADS SHALL BE TRIMED TO A MAXIMUM LENGTH OF 0.045" at 2300,1220 h75
Mechanical 2, Bot Assy:
  text "BOTTOM ASSY" at 6230,3472.5 h100
Mechanical 5, Dims:
  lines w12: 12230,4985 12230,5285 13280,5285 13280,4985 12230,4985 ; 14730,4985 14730,5285 15105,5285 15105,4985 14730,4985
  text "MATERIAL:  Isola IS410 FR-4 or Equivalent" at 9580,8742.5 h112.5
  text "THICKNESS:  0.062\" +/- 0.005\"" at 9580,8442.5 h112.5
  text "PLATING:  1 OZ. COPPER" at 9580,8142.5 h112.5
  text "Please keep this Area free of Copper" at 5876.25,7990 h75
  text "LAYER COUNT:  2" at 9580,7842.5 h112.5
  text "This in an Antenna which is very senstive." at 5876.25,7827.5 h75
  text "CONTROLLED IMPEDENCE:  NO" at 9580,7542.5 h112.5
  text "FINISH:" at 9580,6942.5 h112.5
  text "0.0002\" of NICKEL with 0.00005\" HARD GOLD" at 9580,6642.5 h112.5
  text "SOLDERMASK OVER BARE COPPER (SMOBC)." at 9580,6342.5 h112.5
  text "SOLDERMASK TYPE:  DYNACHEM EPIC 200 LPI OR EQUIVALENT." at 9580,6042.5 h112.5
  text "SOLDERMASK COLOR:  DB6500 BLUE" at 9580,5742.5 h112.5
  text "SILKSCREEN COLOR: YELLOW INK" at 9580,5442.5 h112.5
  text "05-" at 12250,5022.5 h112.5
  text "USE ARTWORK SET NUMBER:" at 9580,5017.5 h112.5
  text "REVISION:" at 13680,5017.5 h112.5
  text "ANY ALTERNATIVES TO THE ABOVE SPECIFICATIONS MUST BE" at 9580,4435 h112.5
  text "APPROVED BY THE ENGINEERING DEPARTMENT AT MICROCHIP." at 9580,4193.75 h112.5
  text "THIS PCB TO BE MANUFACTURED TO MEET ALL ACCEPTANCE LEVELS" at 9580,3635 h112.5
  text "OF A CLASS 2 PCB PER ANSI/IPC-A-600F." at 9580,3393.75 h112.5
  text "ALL DIMENSIONS ARE IN INCHES." at 9580,3017.5 h112.5
  text "04-" at 14375,1302.5 h112.5
Mechanical 7, Mechanical:
  drawing of 398 lines, arcs and shapes, not listed
Mechanical 9, Title:
  text "2.1" at 13035.62,9627.5 h62.5
  text "02/1/06" at 15770,9627.5 h62.5
  text "Full Production Release" at 13305,9622.5 h62.5

## Dimensions
3572.48,5713.84 to 3440.75,6166.1 on Mechanical 1, Top Assy
3926.97,6434.29 to 3805.31,6770 on Mechanical 1, Top Assy
5511.74,5666.15 to 4812.81,7500 on Mechanical 1, Top Assy
5628.47,4176.23 to 6200.4,4029.28 on Mechanical 5, Dims
5980,6325 to 6153.13,7810 on Mechanical 5, Dims
4888.18,4660.78 to 6508.38,5908.26 on Mechanical 5, Dims
5361.3,3817.4 to 5997.54,6416.02 on Mechanical 5, Dims